# EAGLE board Simple_BRD (EAGLE 9.6.2)
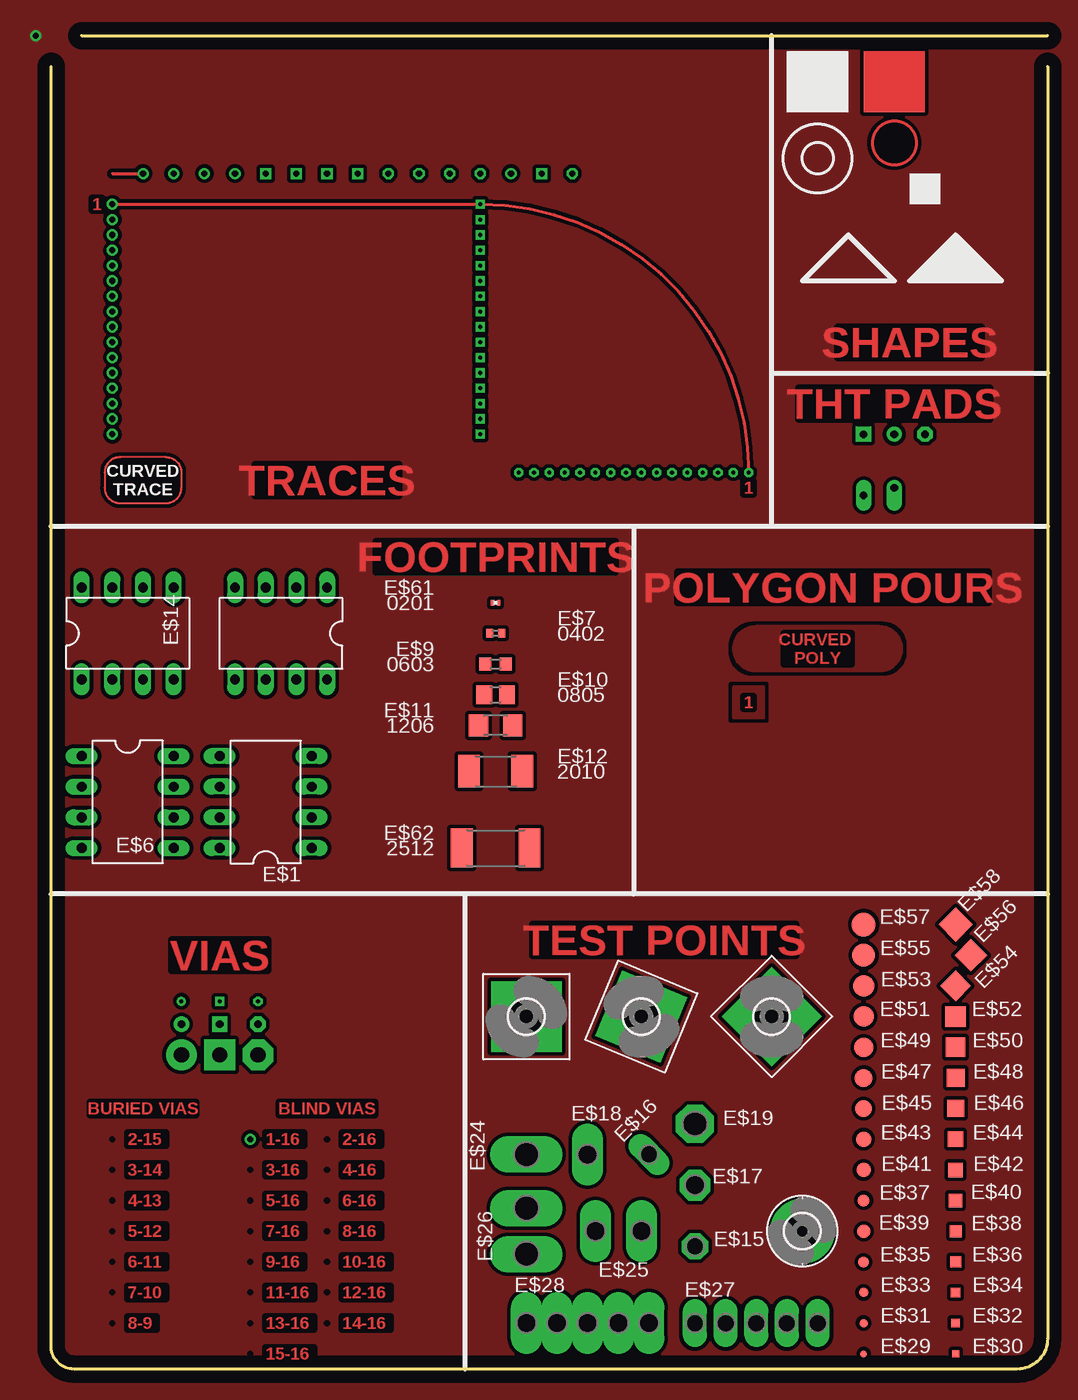
[diagram p0: board, top side]
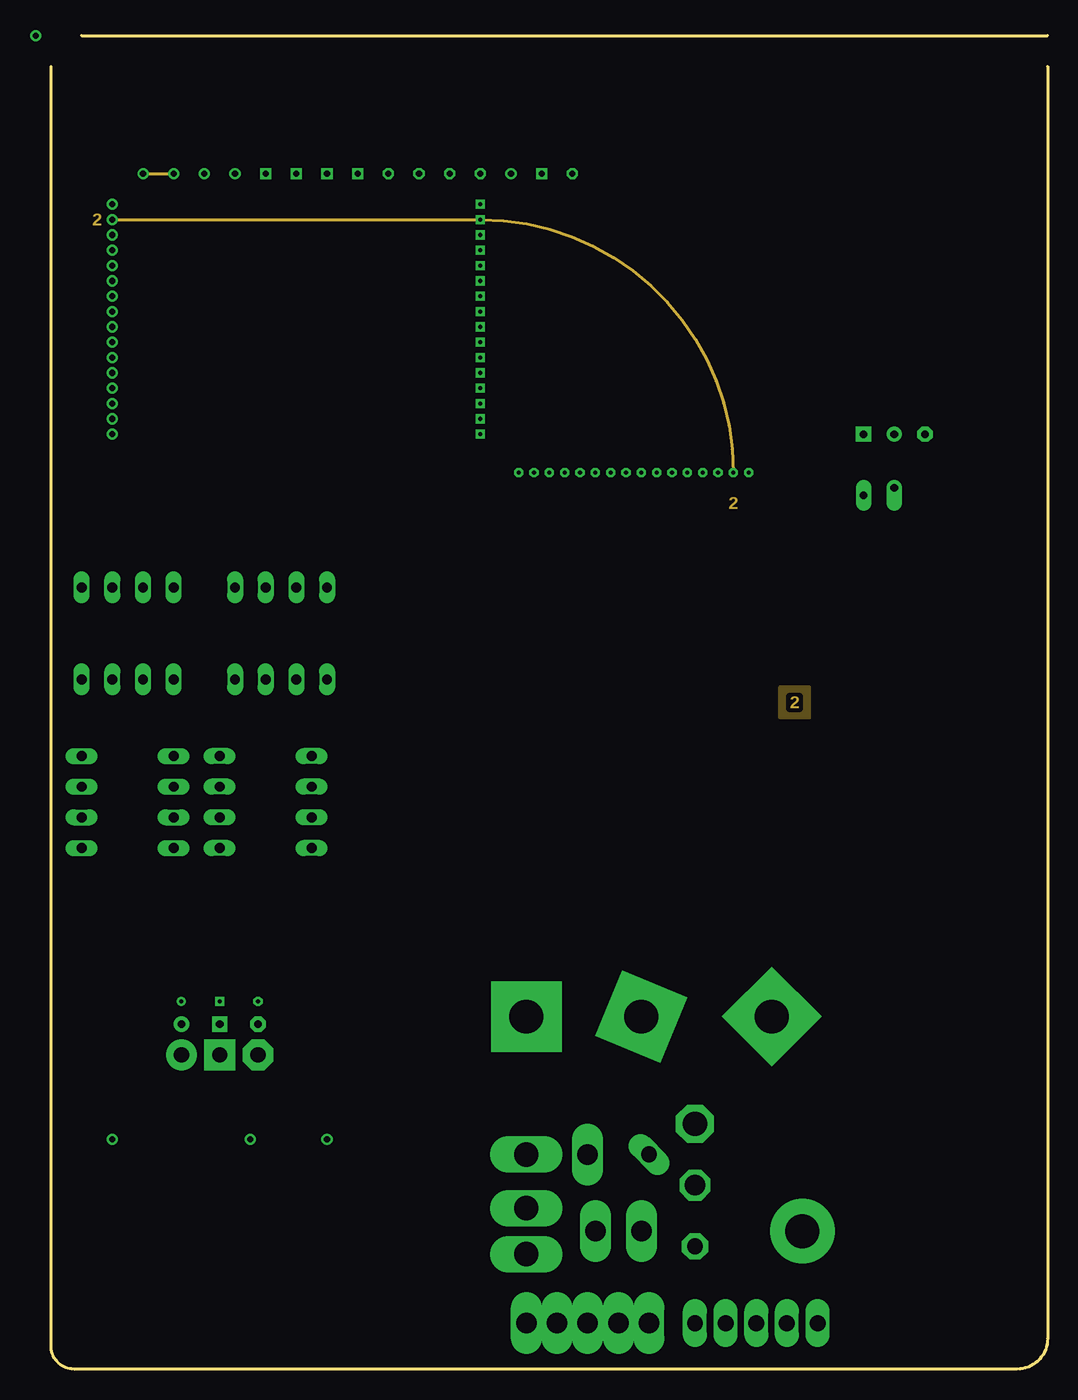
[diagram p1: board, inner layer Route2]
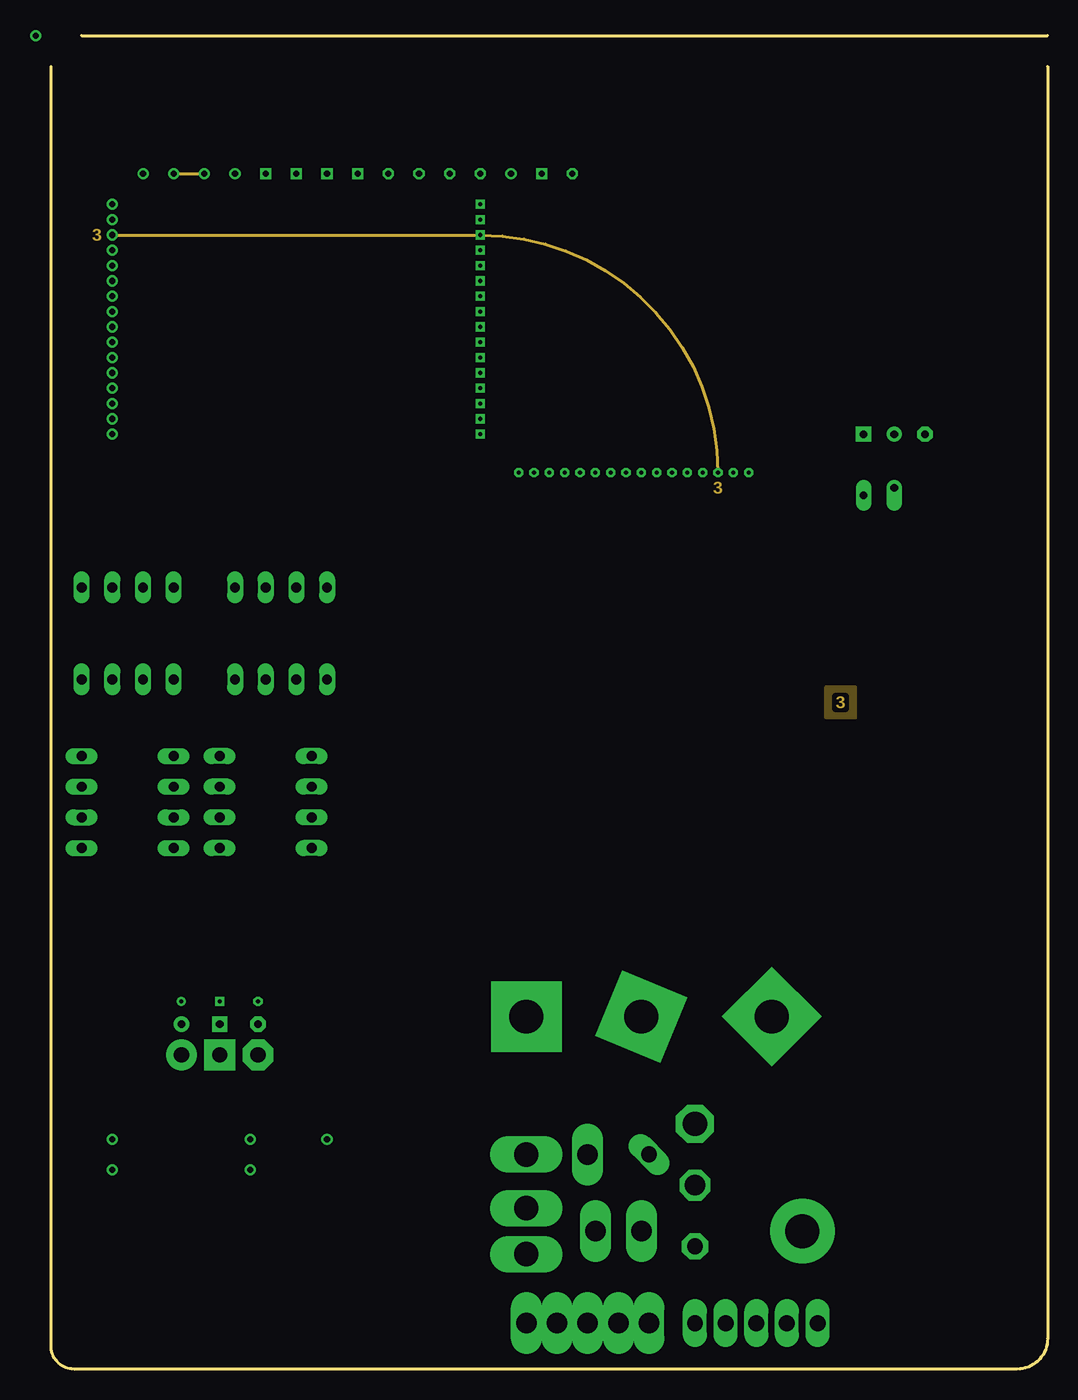
[diagram p2: board, inner layer Route3]
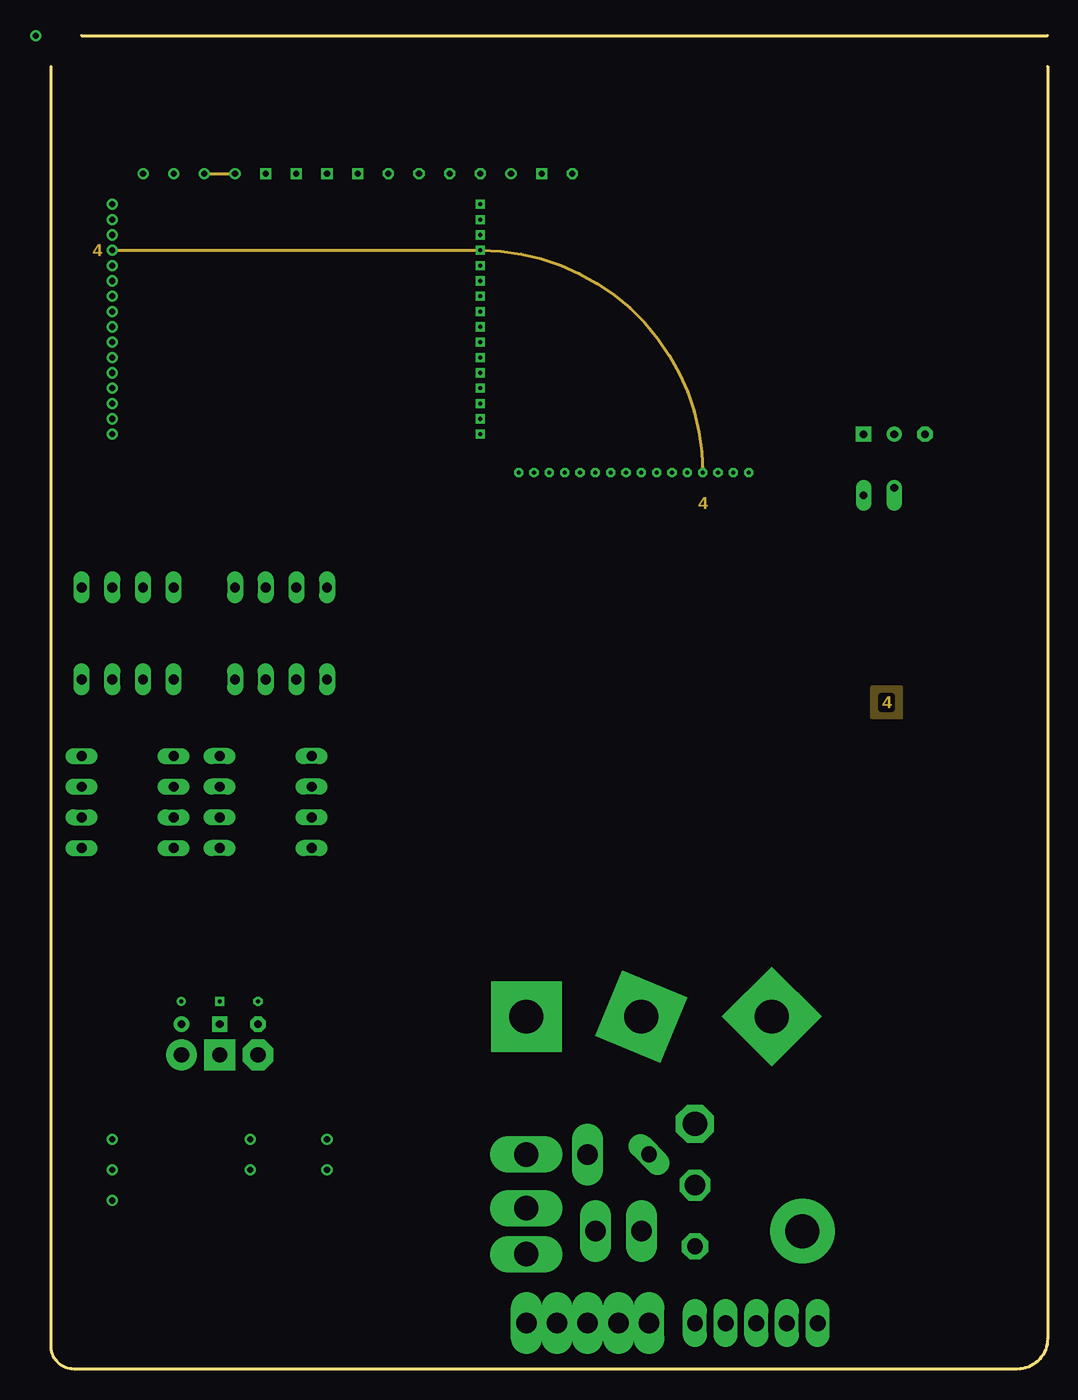
[diagram p3: board, inner layer Route4]
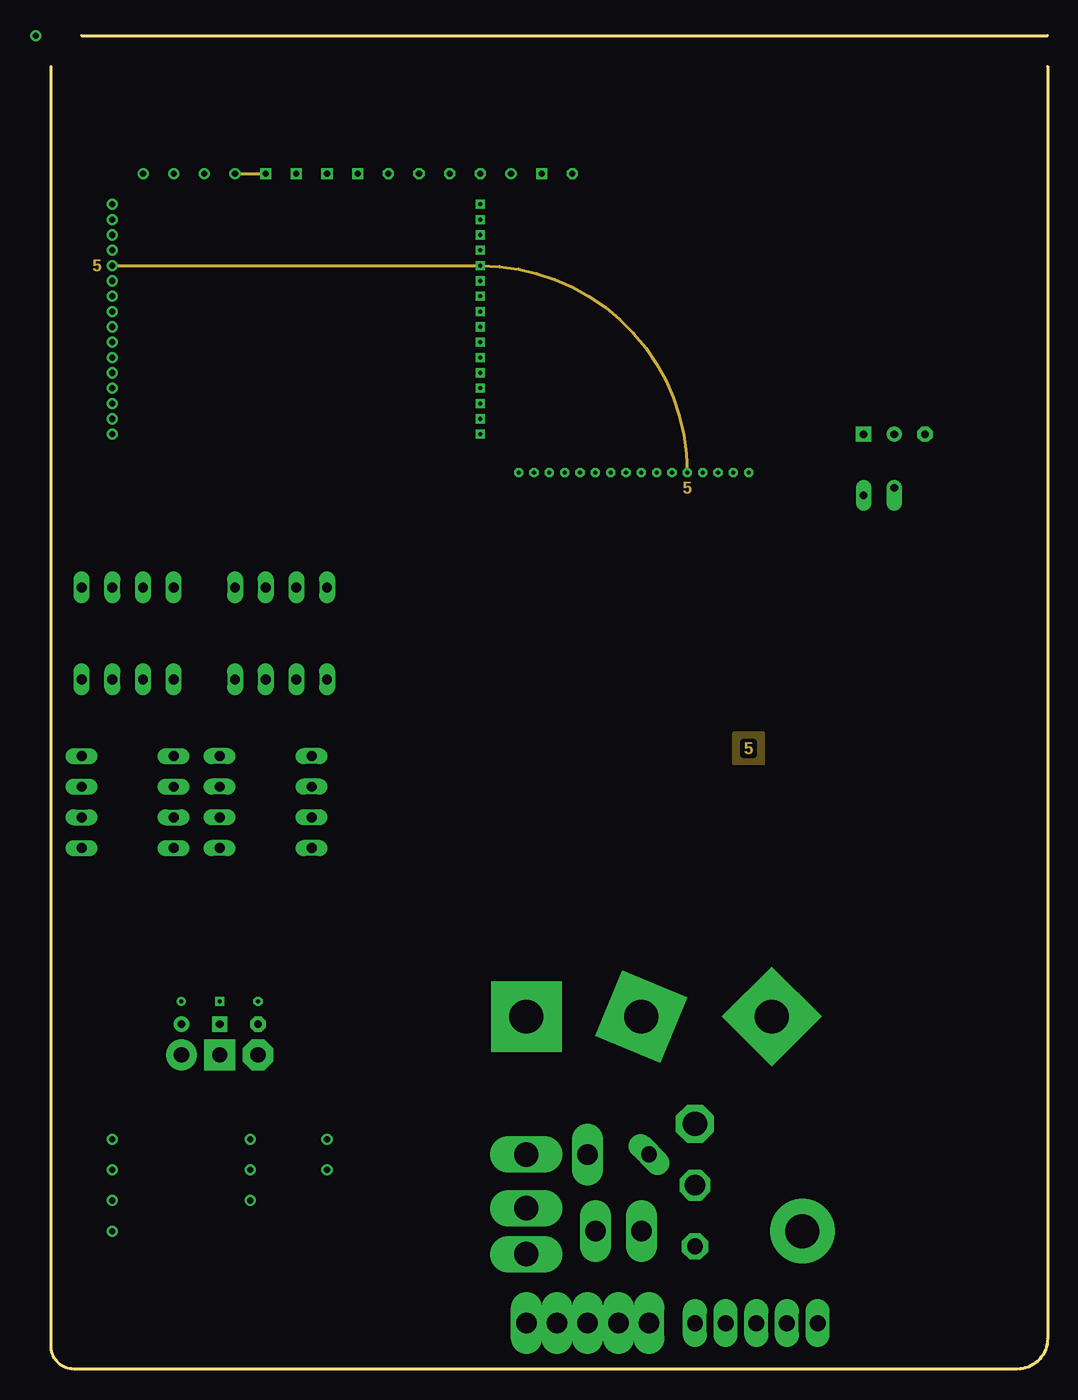
[diagram p4: board, inner layer Route5]
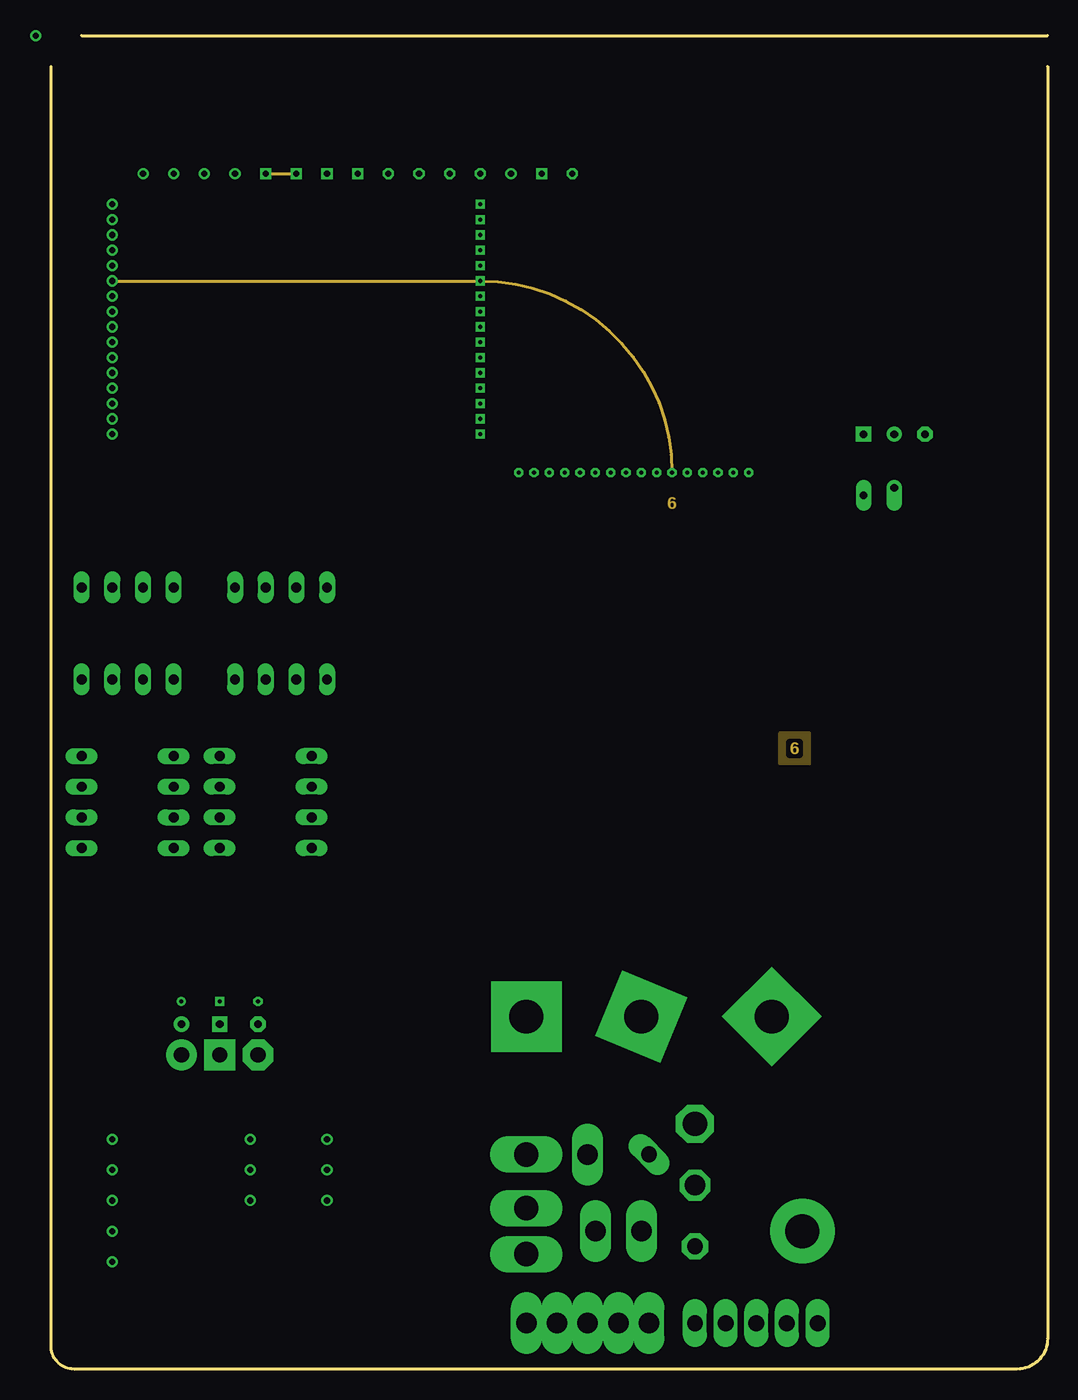
[diagram p5: board, inner layer Route6]
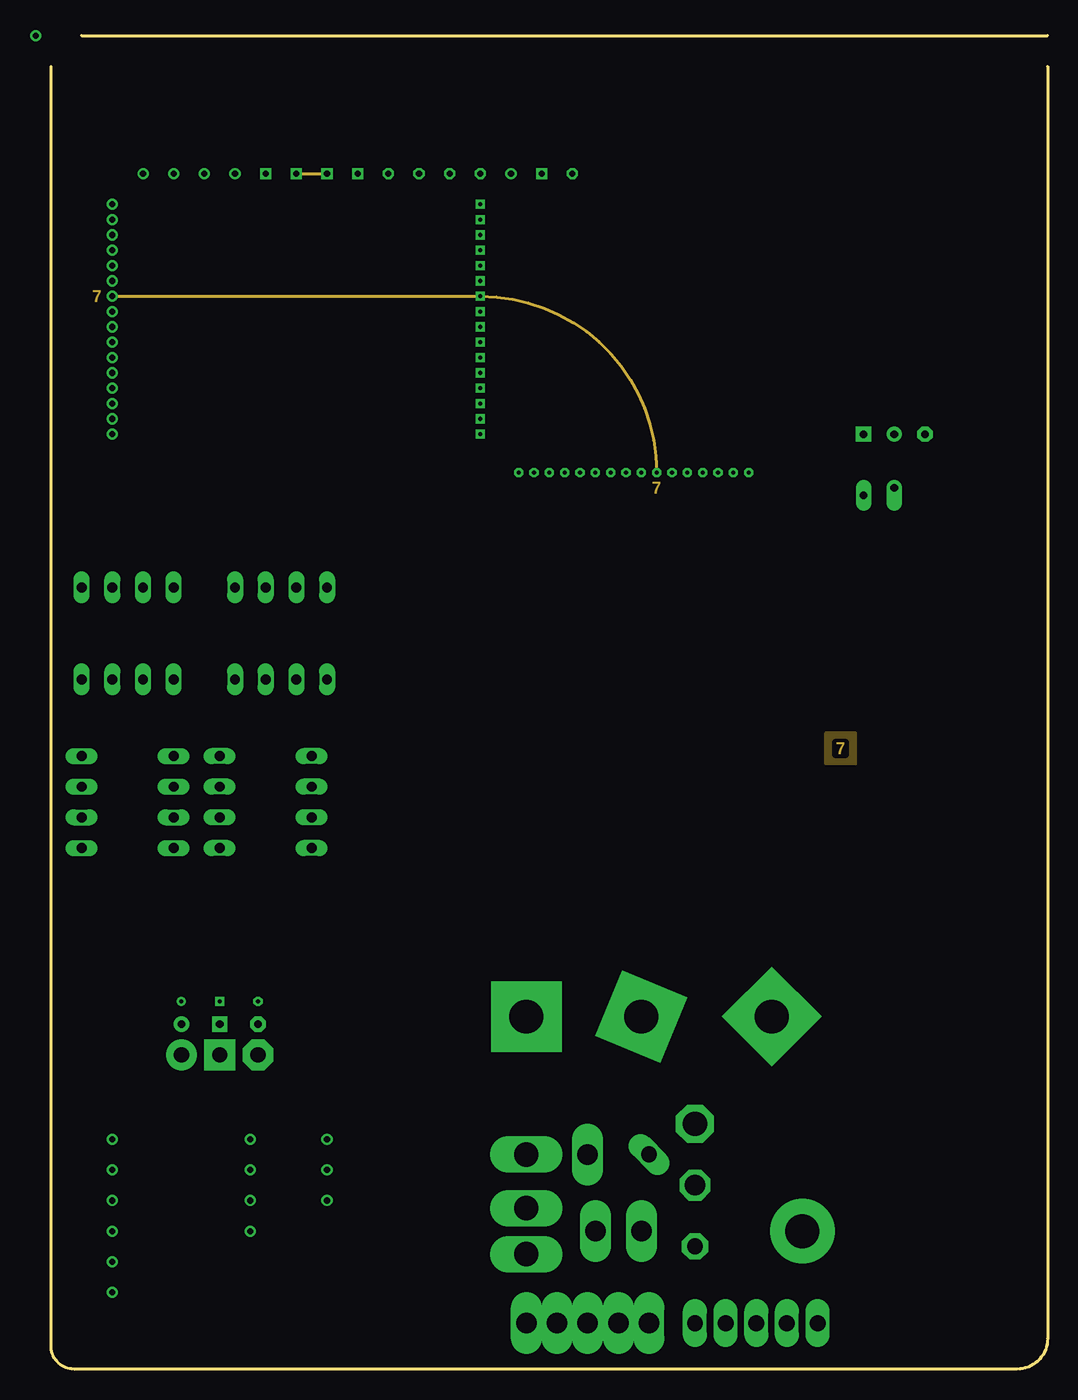
[diagram p6: board, inner layer Route7]
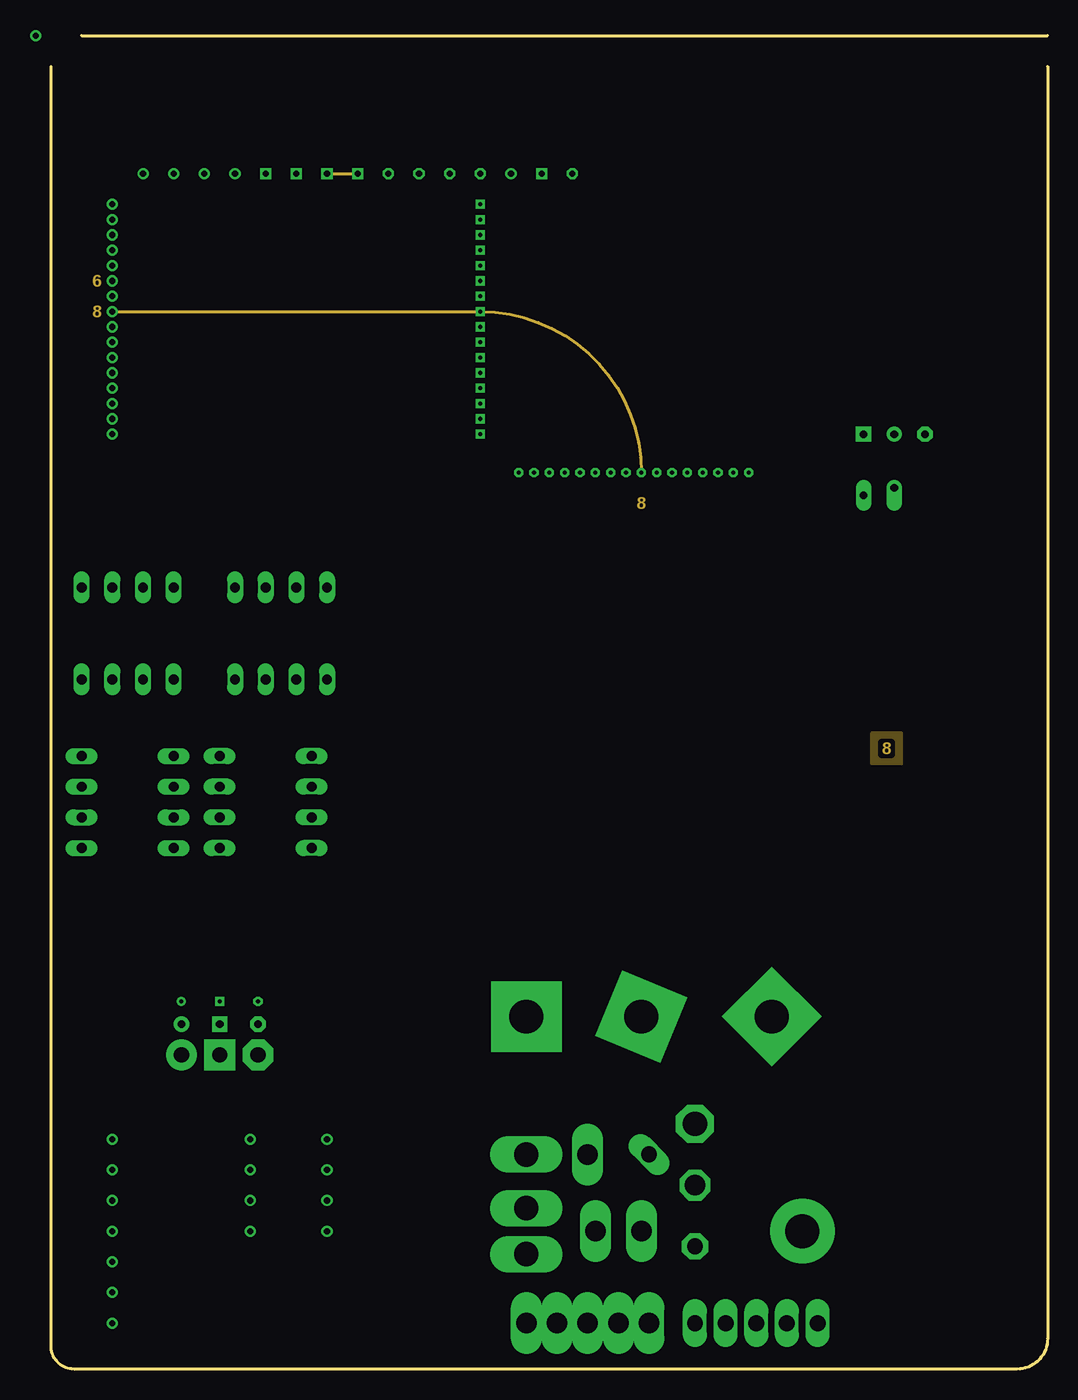
[diagram p7: board, inner layer Route8]
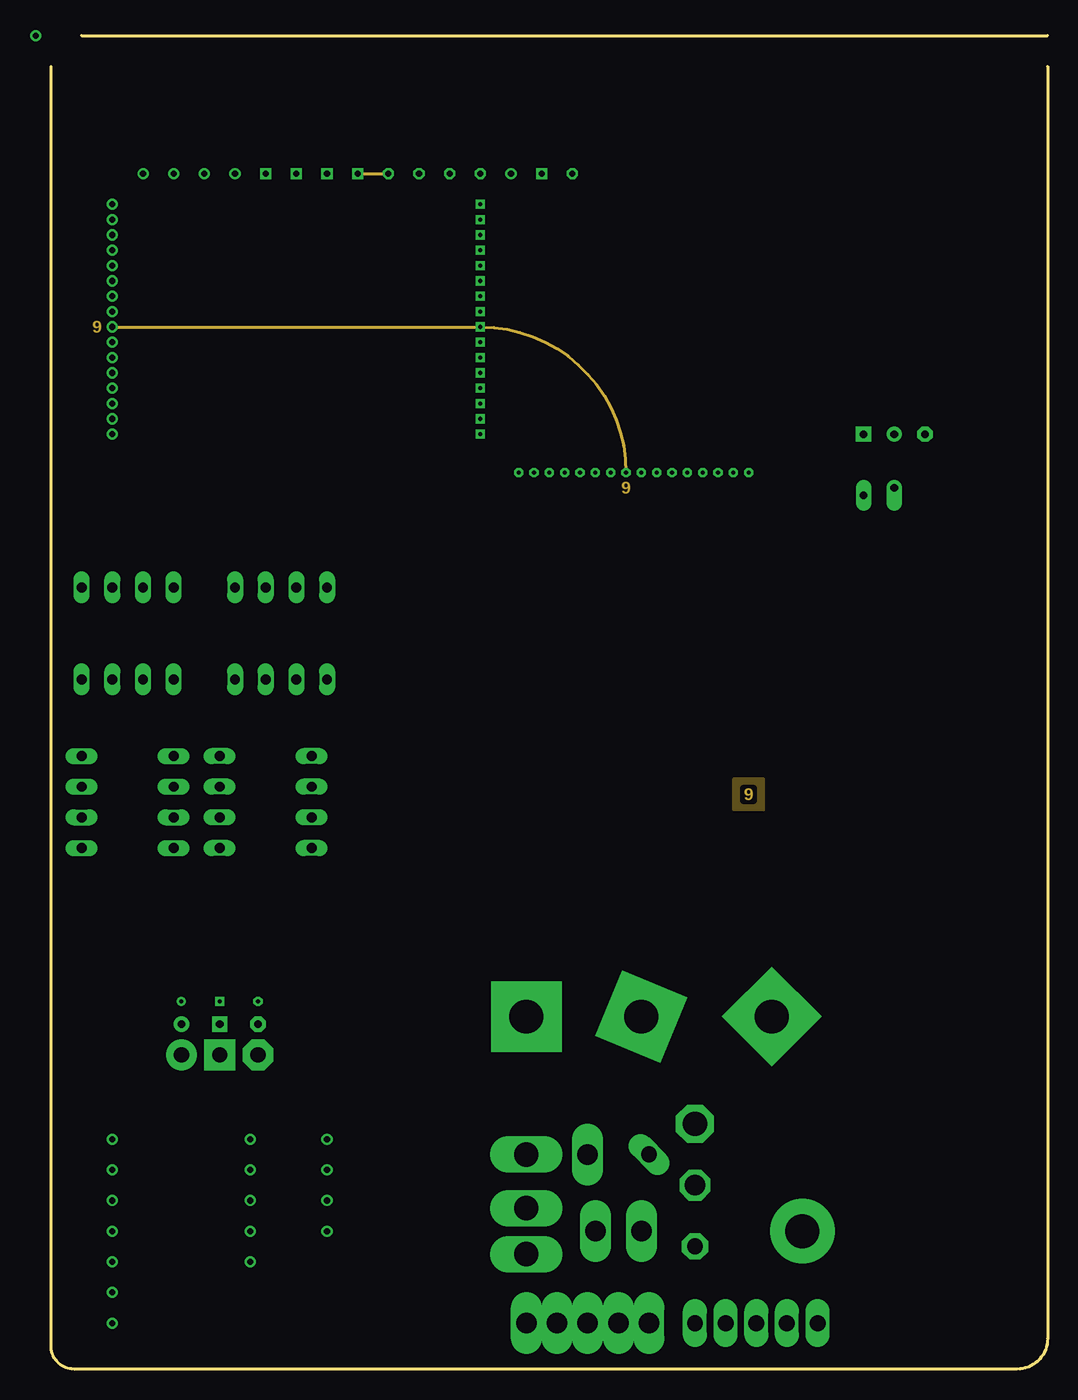
[diagram p8: board, inner layer Route9]
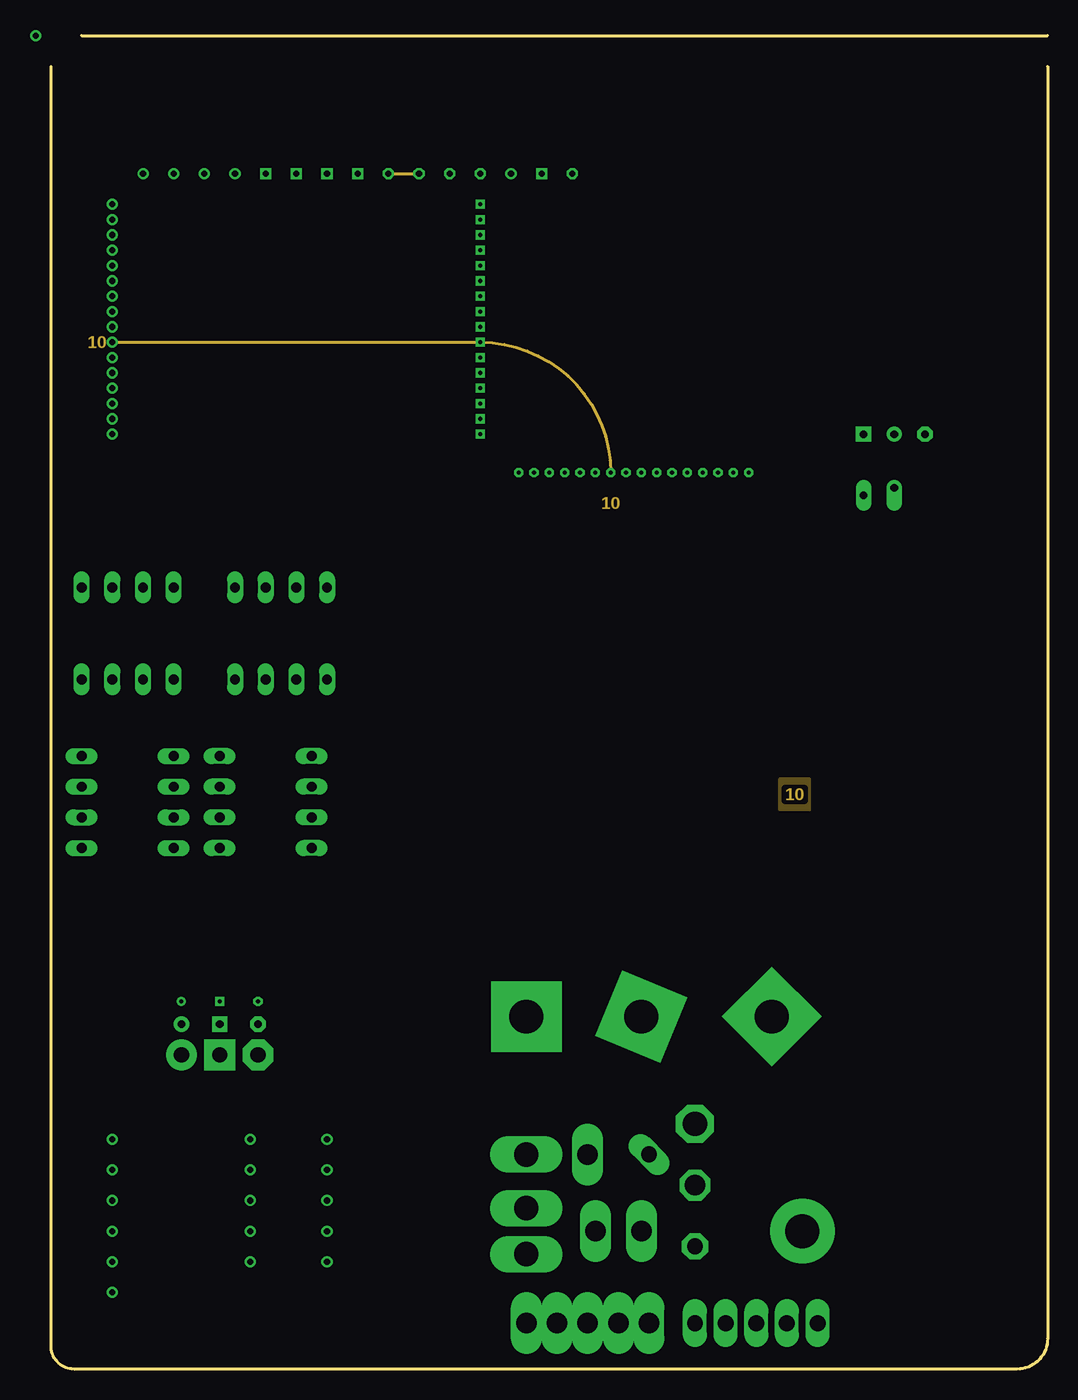
[diagram p9: board, inner layer Route10]
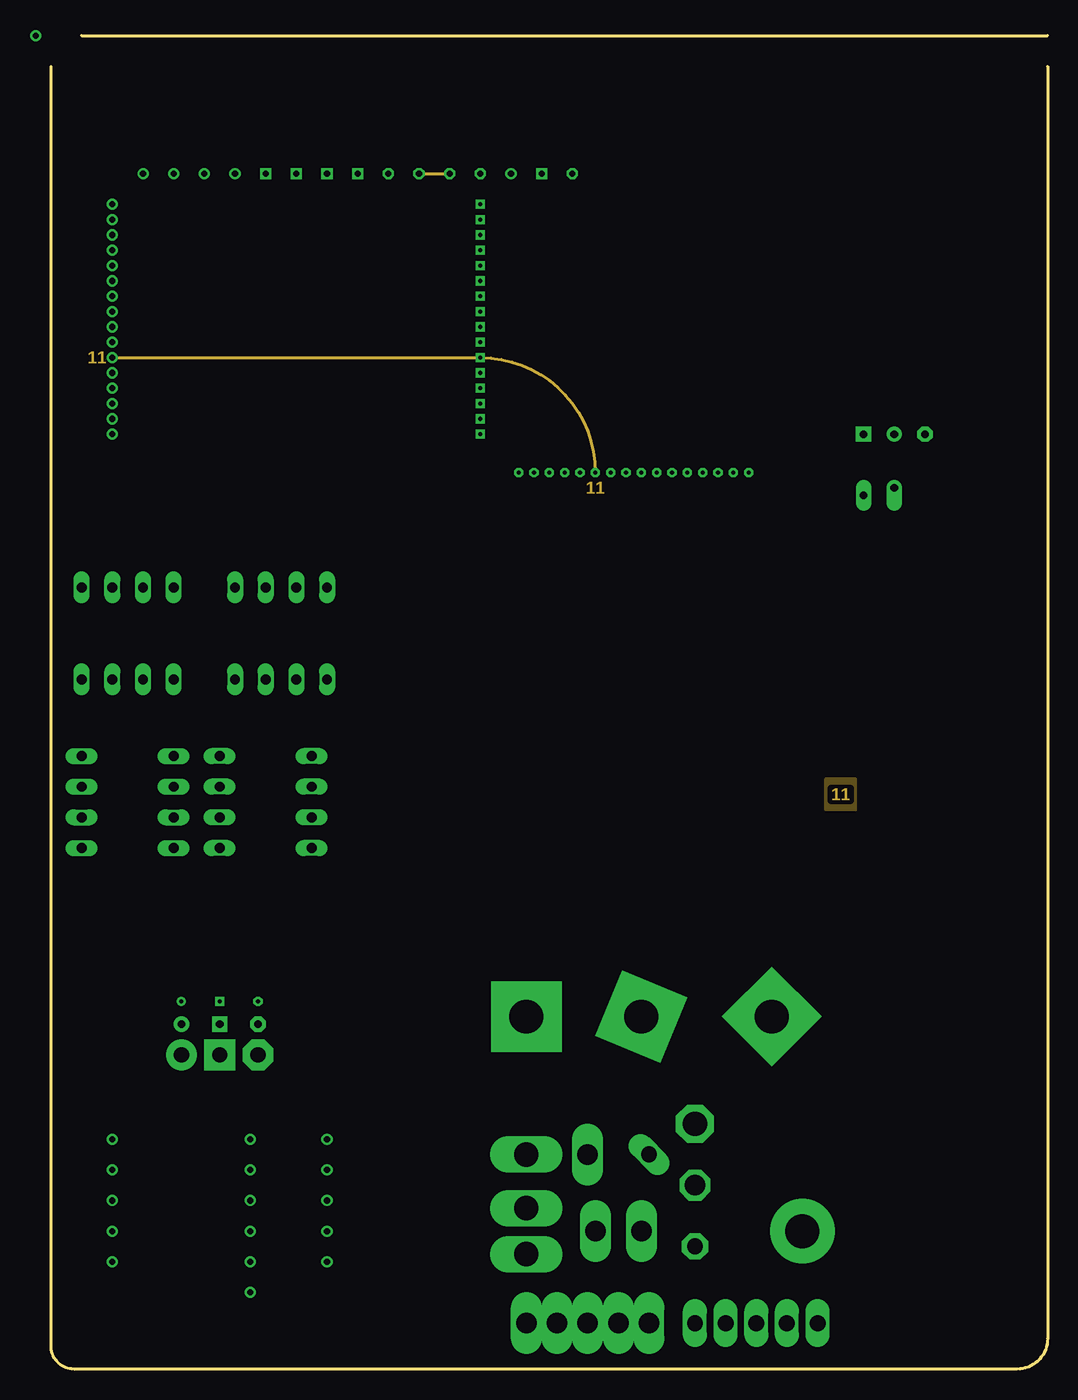
[diagram p10: board, inner layer Route11]
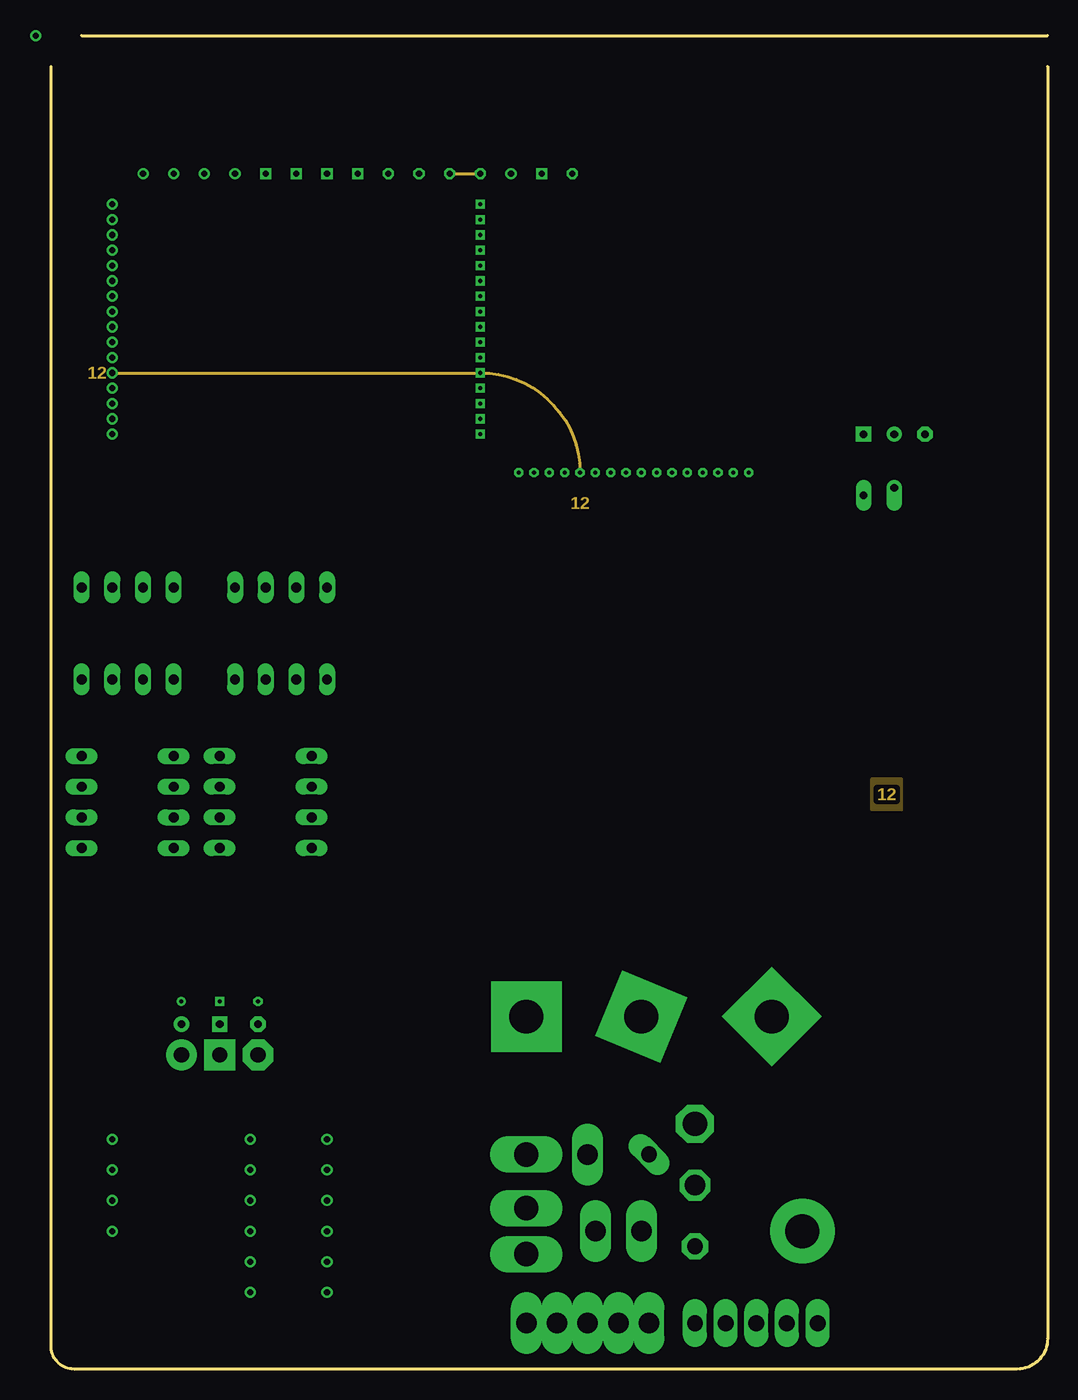
[diagram p11: board, inner layer Route12]
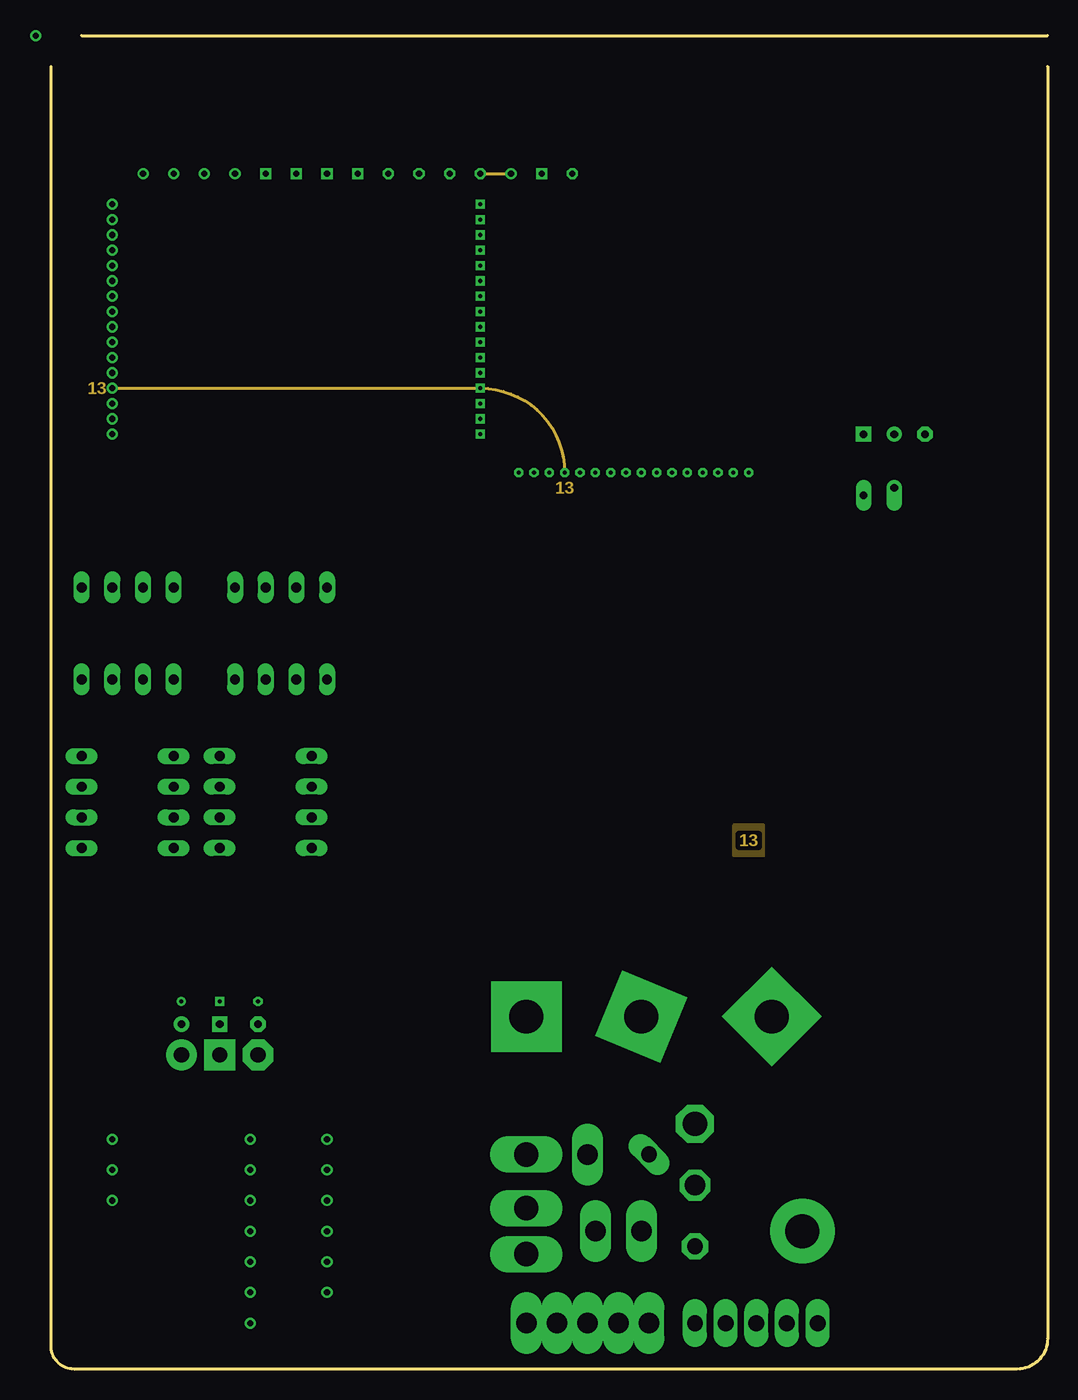
[diagram p12: board, inner layer Route13]
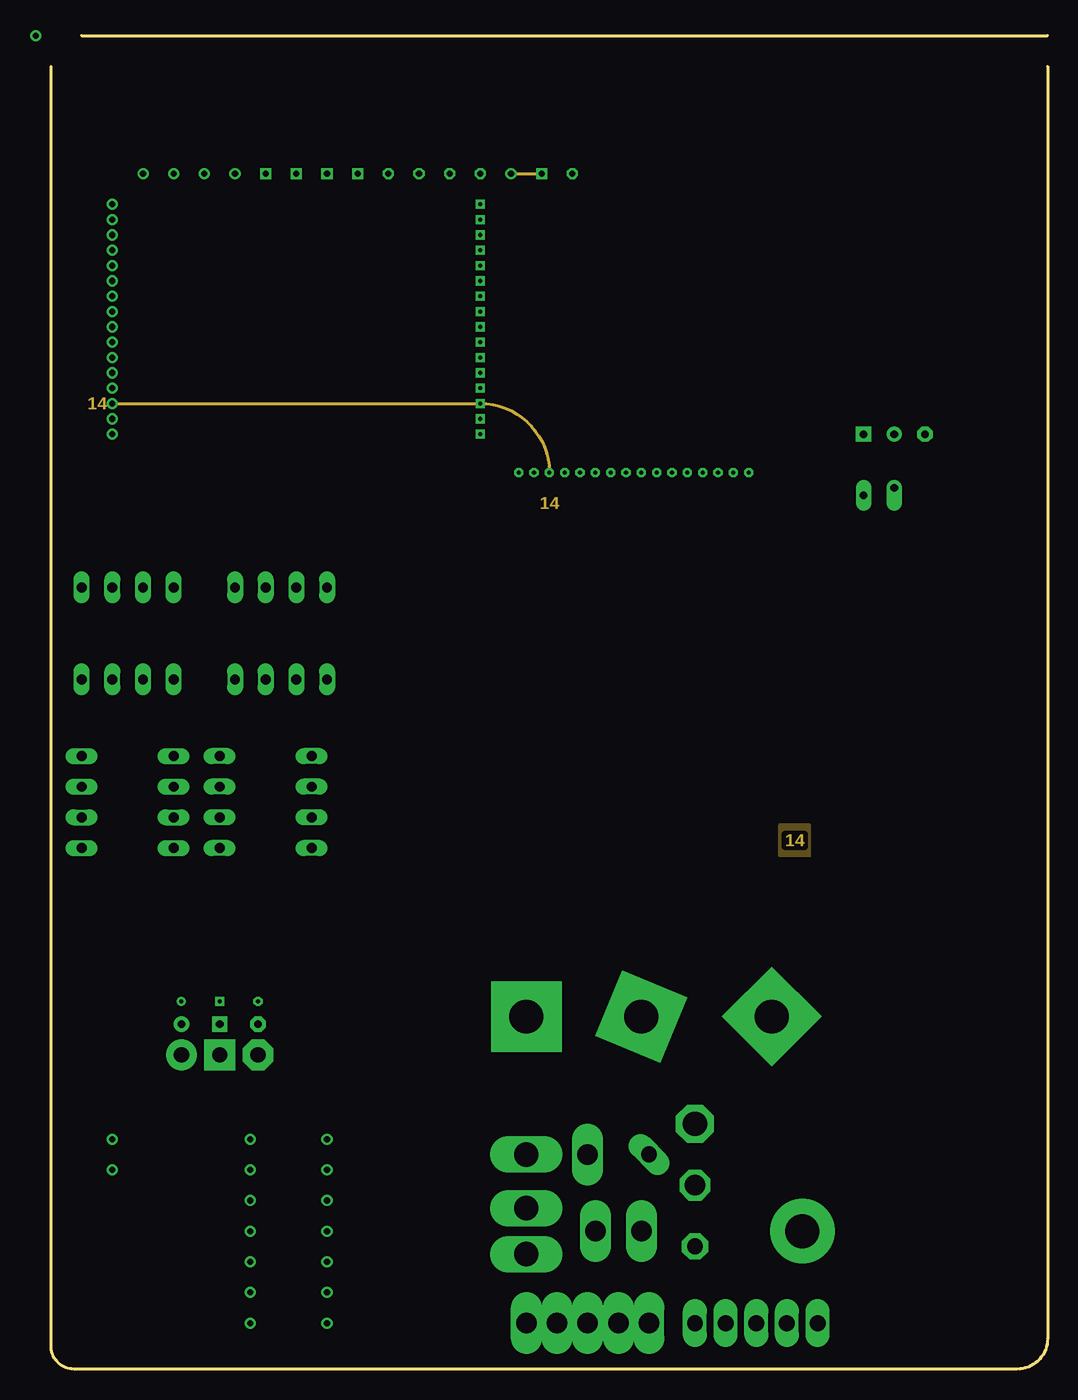
[diagram p13: board, inner layer Route14]
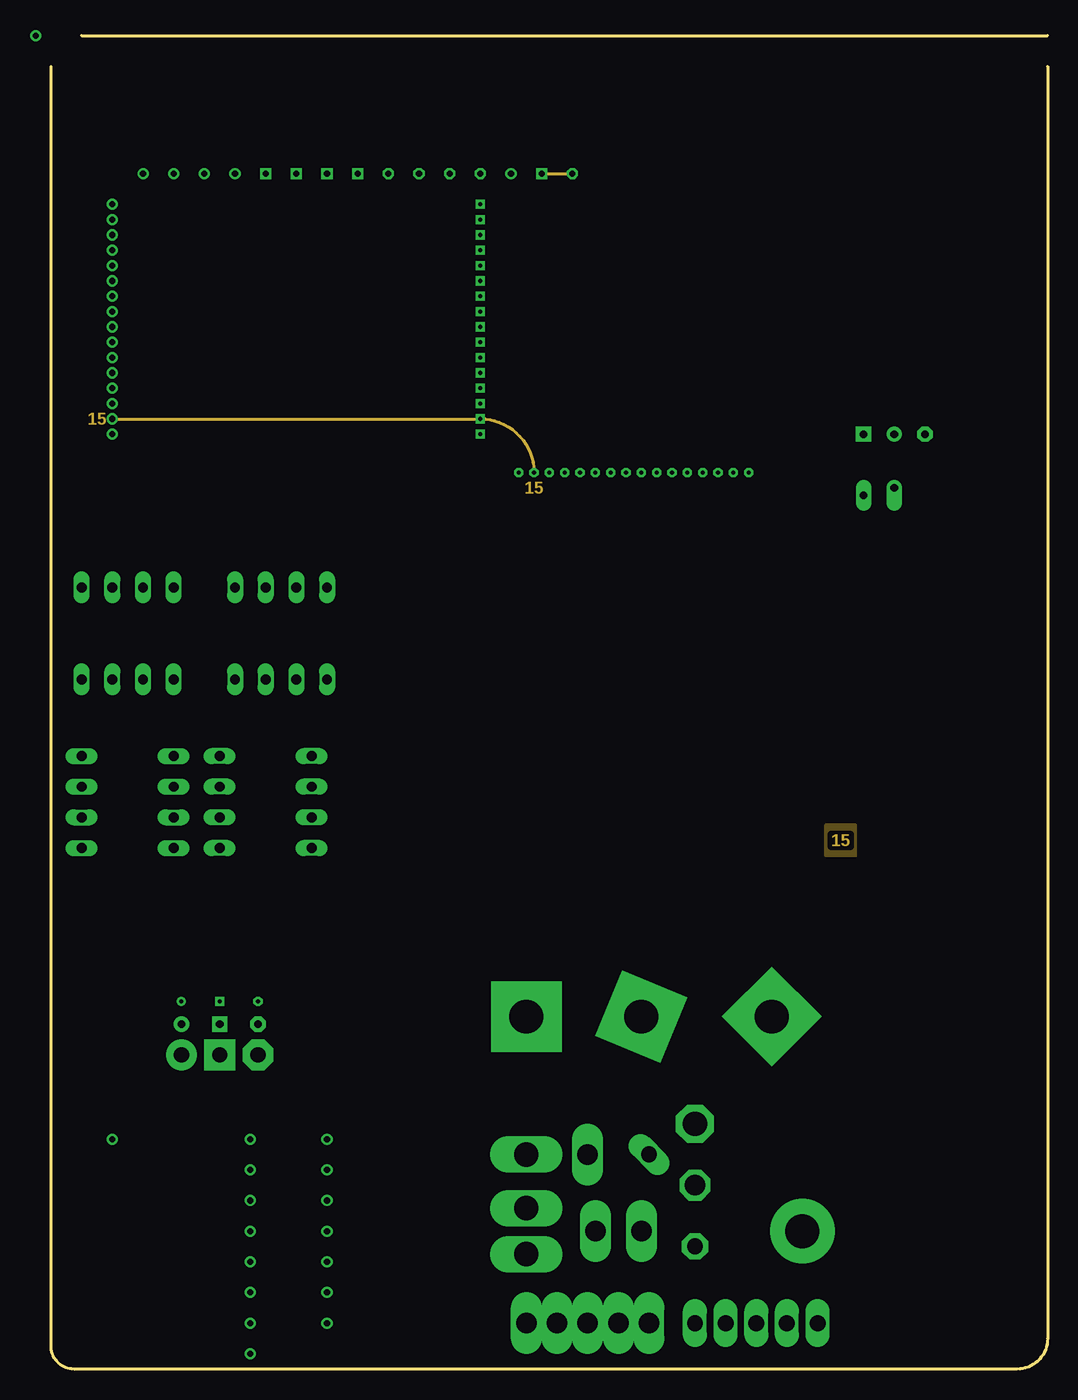
[diagram p14: board, inner layer Route15]
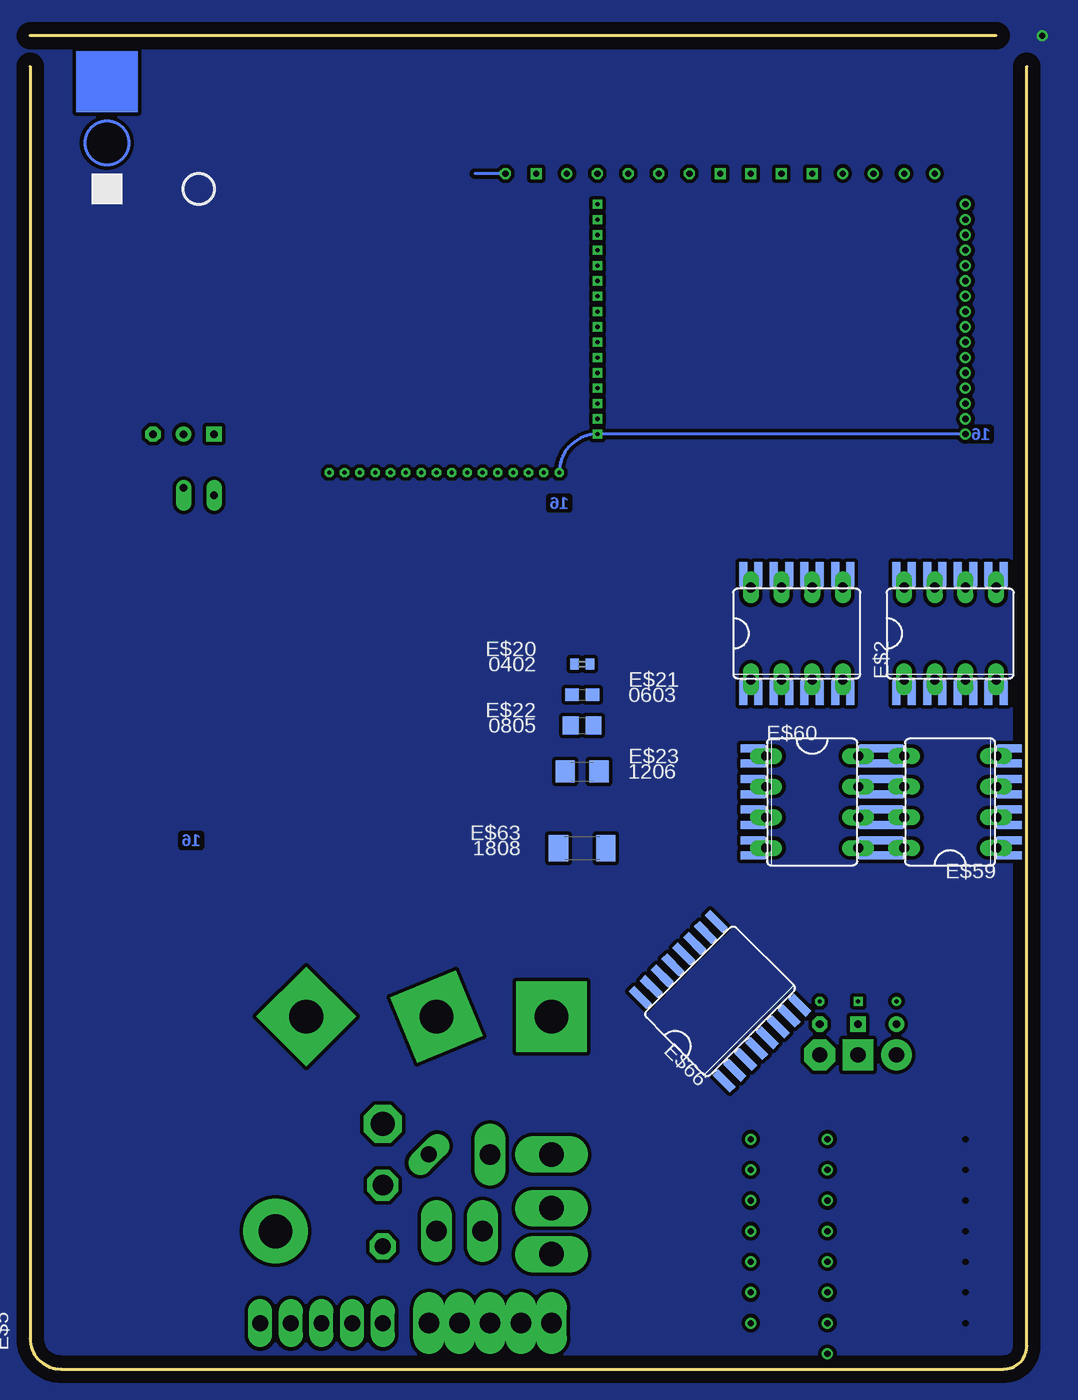
[diagram p15: board, bottom side, seen from below]

Size 82.55 x 110.49 mm. Coordinates in mm from the lower left corner, seen from the top.
Outline: 0,107.95 0,1.91 arc90 1.91,0 80.01,0 arc90 82.55,2.54 82.55,107.95
Outline: 2.54,110.49 82.55,110.49
Copper layers ([[[[[[[[[[[[[[1+(2*(3+(4*(5+(6*(7+(8*9)+10)*11)+12)*13)+14)*15)+16:15]:13]:11]:9]:7]:5]:3]:2]:4]:6]:8]:10]:12]:14]): Top 0.035mm / dielectric 1.5mm / Route2 0.035mm / dielectric 0.15mm / Route3 0.035mm / dielectric 0.2mm / Route4 0.035mm / dielectric 0.15mm / Route5 0.035mm / dielectric 0.2mm / Route6 0.035mm / dielectric 0.15mm / Route7 0.035mm / dielectric 0.2mm / Route8 0.035mm / dielectric 0.15mm / Route9 0.035mm / dielectric 0.2mm / Route10 0.035mm / dielectric 0.15mm / Route11 0.035mm / dielectric 0.2mm / Route12 0.035mm / dielectric 0.15mm / Route13 0.035mm / dielectric 0.2mm / Route14 0.035mm / dielectric 0.15mm / Route15 0.035mm / dielectric 0.2mm / Bottom 0.035mm
Design rules "default *": minimum track width 6mil, minimum drill 0.35mm, track to track 6mil, track to pad 6mil, pad to pad 6mil, via to via 6mil, smd to smd 6mil, copper to edge 40mil, drill to drill 6mil, minimum pad ring 10mil, minimum via ring 8mil, stop-mask expansion 4mil, vias tented up to drill 0mil, thermal gap 10mil

## Footprints (pad centres in the part's own frame; a part is rotated, then mirrored left to right if it is on the bottom)
DIL08 = drill 0.813 long: 1 -3.81,-3.81; 2 -1.27,-3.81; 3 1.27,-3.81; 4 3.81,-3.81; 5 3.81,3.81; 6 1.27,3.81; 7 -1.27,3.81; 8 -3.81,3.81
SO16L = smd 0.66 x 2.032: 1 -4.445,-4.902; 2 -3.175,-4.902; 3 -1.905,-4.902; 4 -0.635,-4.902; 5 0.635,-4.902; 6 1.905,-4.902; 7 3.175,-4.902; 8 4.445,-4.902; 9 4.445,4.902; 10 3.175,4.902; 11 1.905,4.902; 12 0.635,4.902; 13 -0.635,4.902; 14 -1.905,4.902; 15 -3.175,4.902; 16 -4.445,4.902
TEST = drill 0.635 pad 1.27 square: P$1 0,0 | drill 0.635 pad 1.27: P$2 2.54,0 | drill 0.635 pad 1.27 octagon: P$3 5.08,0 | drill 0.635 pad 1.27 long: P$4 0,-5.08 | drill 0.635 pad 1.27 offset: P$5 2.54,-4.445
2,8-PAD-SQUARE = drill 2.8 pad 5.842 square: B2,8 0,0
R0402 = smd 0.6 x 0.7: 1 -0.5,0; 2 0.5,0
2,8-PAD = drill 2.8 pad 5.334: B2,8 0,0
R0603 = smd 1 x 1.1: 1 -0.85,0; 2 0.85,0
R0805 = smd 1.3 x 1.5: 1 -0.95,0; 2 0.95,0
R1206 = smd 1.6 x 1.803: 1 -1.422,0; 2 1.422,0
R2010 = smd 1.8 x 2.7: 1 -2.2,0; 2 2.2,0
P1-13 = drill 1.321 pad 2.159 octagon: TP 0,0
P1-13Y = drill 1.321 pad 1.905 long: TP 0,0
P1-17 = drill 1.702 pad 2.54 octagon: TP 0,0
P1-17Y = drill 1.702 pad 2.121 long: TP 0,0
P1-20 = drill 2.007 pad 3.15 octagon: TP 0,0
C0402 = smd 0.7 x 0.9: 1 -0.65,0; 2 0.65,0
C0603 = smd 1.1 x 1: 1 -0.85,0; 2 0.85,0
C0805 = smd 1.3 x 1.5: 1 -0.95,0; 2 0.95,0
C1206 = smd 1.6 x 1.8: 1 -1.4,0; 2 1.4,0
P1-20Y = drill 2.007 pad 2.54 long: TP 0,0
P2-38-17 = drill 1.702 pad 2.121 long: TP-1 -1.905,0; TP-2 1.905,0
P2-38-20 = drill 2.007 pad 2.54 long: TP-1 -1.905,0; TP-2 1.905,0
P5-25-13 = drill 1.321 pad 1.905 long: TP-1 -5.08,0; TP-2 -2.54,0; TP-3 0,0; TP-4 2.54,0; TP-5 5.08,0
P5-25-17 = drill 1.702 pad 1.93 long: TP-1 -5.08,0; TP-2 -2.54,0; TP-3 0,0; TP-4 2.54,0; TP-5 5.08,0
TP06R = smd 0.6 x 0.6: TP 0,0
TP06SQ = smd 0.6 x 0.6: TP 0,0
TP07R = smd 0.7 x 0.7: TP 0,0
TP07SQ = smd 0.7 x 0.7: TP 0,0
TP08R = smd 0.8 x 0.8: TP 0,0
TP08SQ = smd 0.8 x 0.8: TP 0,0
TP09R = smd 0.9 x 0.9: TP 0,0
TP09SQ = smd 0.9 x 0.9: TP 0,0
TP10R = smd 1 x 1: TP 0,0
TP10SQ = smd 1 x 1: TP 0,0
TP11R = smd 1.1 x 1.1: TP 0,0
TP11SQ = smd 1.1 x 1.1: TP 0,0
TP12R = smd 1.2 x 1.2: TP 0,0
TP12SQ = smd 1.2 x 1.2: TP 0,0
TP13R = smd 1.3 x 1.3: TP 0,0
TP13SQ = smd 1.3 x 1.3: TP 0,0
TP14R = smd 1.4 x 1.4: TP 0,0
TP14SQ = smd 1.4 x 1.4: TP 0,0
TP15R = smd 1.5 x 1.5: TP 0,0
TP15SQ = smd 1.5 x 1.5: TP 0,0
TP16R = smd 1.6 x 1.6: TP 0,0
TP16SQ = smd 1.6 x 1.6: TP 0,0
TP17R = smd 1.7 x 1.7: TP 0,0
TP17SQ = smd 1.7 x 1.7: TP 0,0
TP18R = smd 1.8 x 1.8: TP 0,0
TP18SQ = smd 1.8 x 1.8: TP 0,0
TP19R = smd 1.9 x 1.9: TP 0,0
TP19SQ = smd 1.9 x 1.9: TP 0,0
TP20R = smd 2 x 2: TP 0,0
TP20SQ = smd 2 x 2: TP 0,0
R0201 = smd 0.28 x 0.43: 1 -0.255,0; 2 0.255,0
R2512 = smd 1.8 x 3.2: 1 -2.8,0; 2 2.8,0
C1808 = smd 1.6 x 2.2: 1 -1.95,0; 2 1.95,0

## Placement (x,y rotation side)
E$1  [DIL08]  17.78,46.99 90 top
E$2  [SO16L]  6.35,60.96 0 bottom
E$3  [TEST]  67.31,77.47 0 top
E$4  [2,8-PAD-SQUARE]  39.37,29.21 0 top
E$5  [SO16L]  19.05,60.96 0 bottom
E$6  [DIL08]  6.35,46.99 270 top
E$7  1R  [R0402]  36.83,60.96 0 top
E$8  [2,8-PAD]  62.23,11.43 0 top
E$9  2R  [R0603]  36.83,58.42 0 top
E$10  3R  [R0805]  36.83,55.88 0 top
E$11  4R  [R1206]  36.83,53.34 0 top
E$12  5R  [R2010]  36.83,49.53 0 top
E$13  [DIL08]  19.05,60.96 180 top
E$14  [DIL08]  6.35,60.96 0 top
E$15  [P1-13]  53.34,10.16 270 top
E$16  [P1-13Y]  49.53,17.78 45 top
E$17  [P1-17]  53.34,15.24 270 top
E$18  [P1-17Y]  44.45,17.78 0 top
E$19  [P1-20]  53.34,20.32 270 top
E$20  0C  [C0402]  36.83,58.42 0 bottom
E$21  2C  [C0603]  36.83,55.88 0 bottom
E$22  3C  [C0805]  36.83,53.34 0 bottom
E$23  4C  [C1206]  36.83,49.53 0 bottom
E$24  [P1-20Y]  39.37,17.78 90 top
E$25  [P2-38-17]  46.99,11.43 180 top
E$26  [P2-38-20]  39.37,11.43 90 top
E$27  [P5-25-13]  58.42,3.81 0 top
E$28  [P5-25-17]  44.45,3.81 0 top
E$29  [TP06R]  67.31,1.27 0 top
E$30  [TP06SQ]  74.93,1.27 0 top
E$31  [TP07R]  67.31,3.81 0 top
E$32  [TP07SQ]  74.93,3.81 0 top
E$33  [TP08R]  67.31,6.35 0 top
E$34  [TP08SQ]  74.93,6.35 0 top
E$35  [TP09R]  67.31,8.89 0 top
E$36  [TP09SQ]  74.93,8.89 0 top
E$37  [TP10R]  67.31,13.97 0 top
E$38  [TP10SQ]  74.93,11.43 0 top
E$39  [TP11R]  67.31,11.43 0 top
E$40  [TP11SQ]  74.93,13.97 0 top
E$41  [TP12R]  67.31,16.51 0 top
E$42  [TP12SQ]  74.93,16.51 0 top
E$43  [TP13R]  67.31,19.05 0 top
E$44  [TP13SQ]  74.93,19.05 0 top
E$45  [TP14R]  67.31,21.59 0 top
E$46  [TP14SQ]  74.93,21.59 0 top
E$47  [TP15R]  67.31,24.13 0 top
E$48  [TP15SQ]  74.93,24.13 0 top
E$49  [TP16R]  67.31,26.67 0 top
E$50  [TP16SQ]  74.93,26.67 0 top
E$51  [TP17R]  67.31,29.21 0 top
E$52  [TP17SQ]  74.93,29.21 0 top
E$53  [TP18R]  67.31,31.75 0 top
E$54  [TP18SQ]  74.93,31.75 45 top
E$55  [TP19R]  67.31,34.29 0 top
E$56  [TP19SQ]  76.2,34.29 45 top
E$57  [TP20R]  67.31,36.83 0 top
E$58  [TP20SQ]  74.93,36.83 45 top
E$59  [SO16L]  6.35,46.99 90 bottom
E$60  [SO16L]  17.78,46.99 270 bottom
E$61  0R  [R0201]  36.83,63.5 0 top
E$62  6R  [R2512]  36.83,43.18 0 top
E$63  5C  [C1808]  36.83,43.18 0 bottom
E$64  [2,8-PAD-SQUARE]  48.9,29.21 67.5 top
E$65  [2,8-PAD-SQUARE]  59.69,29.21 45 top
E$66  [SO16L]  25.4,30.48 45 bottom

## Library data of the parts
E$1 E$2 E$5 E$6 E$13 E$14 E$59 E$60 E$66 = 74xx-us
E$3 = untitled
E$4 E$8 E$64 E$65 = holes
E$7 E$9-E$12 E$20-E$23 E$61-E$63 = rcl
E$15-E$19 E$24-E$58 = testpad

## Tracks (layer width: path | path; a pad name or v marks a point on that pad's centre or on a via)
GND1  (via drill 0.51)
  other vias: -1.27,110.49
  pour Bottom (isolate 0.305): -13.97,129.54 -13.97,-2.54 114.3,-2.54 114.3,129.54
  pour Top (isolate 0.305, rank 2): -27.94,114.3 -27.94,-2.54 88.9,-2.54 88.9,114.3
S$1  (via drill 0.35, 0.51)
  Top 0.254: v5.08,96.52 v35.56,96.52 arc-90 v57.78,74.3
S$2  (via drill 0.35, 0.51)
  Route2 0.254: v5.08,95.25 v35.56,95.25 arc-90 v56.52,74.3
S$3  (via drill 0.35)
  other vias: 10.79,30.48
S$4  (via drill 0.35, 0.51)
  Route3 0.254: v5.08,93.98 v35.56,93.98 arc-90 v55.24,74.3
S$5  (via drill 0.35, 0.51)
  Route4 0.254: v5.08,92.71 v35.56,92.71 arc-90 v53.98,74.3
S$6  (via drill 0.35, 0.51)
  Route5 0.254: v5.08,91.44 v35.56,91.44 arc-90 v52.7,74.3
S$7  (via drill 0.35, 0.51)
  Route6 0.254: v5.08,90.17 v35.56,90.17 arc-90 v51.44,74.3
S$8  (via drill 0.35, 0.51)
  Route7 0.254: v5.08,88.9 v35.56,88.9 arc-90 v50.16,74.3
S$9  (via drill 0.35, 0.51)
  Route8 0.254: v5.08,87.63 v35.56,87.63 arc-90 v48.9,74.3
S$10  (via drill 0.35, 0.51)
  Route9 0.254: v5.08,86.36 v35.56,86.36 arc-90 v47.62,74.3
S$11  (via drill 0.35, 0.51)
  Route10 0.254: v5.08,85.09 v35.56,85.09 arc-90 v46.35,74.3
S$12  (via drill 0.35, 0.51)
  Route12 0.254: v5.08,82.55 v35.56,82.55 arc-90 v43.81,74.3
S$13  (via drill 0.35, 0.51)
  Route11 0.254: v5.08,83.82 v35.56,83.82 arc-90 v45.09,74.3
S$14  (via drill 0.35, 0.51)
  Route13 0.254: v5.08,81.28 v35.56,81.28 arc-90 v42.55,74.3
S$15  (via drill 0.35, 0.51)
  Route14 0.254: v5.08,80.01 v35.56,80.01 arc-90 v41.27,74.3
S$16  (via drill 0.35, 0.51)
  Route15 0.254: v5.08,78.74 v35.56,78.74 arc-90 v40.01,74.3
S$17  (via drill 0.35, 0.51)
  Bottom 0.254: v5.08,77.47 v35.56,77.47 arc-90 v38.73,74.3
S$18  (via drill 0.35)
  other vias: 13.97,30.48
S$19  (via drill 0.35)
  other vias: 17.14,30.48
S$20  (via drill 0.64 pad 1.27)
  other vias: 10.79,28.58
S$21
  Top 0.152: 9.53,75.56 5.71,75.56 arc90 4.45,74.3 4.45,73.03 arc90 5.71,71.75 9.53,71.75 arc90 10.79,73.03 10.79,74.3 arc90 9.53,75.56
S$22  (via drill 0.64 pad 1.27)
  other vias: 13.97,28.58
S$23  (via drill 0.64 pad 1.27)
  other vias: 17.14,28.58
S$24  (via drill 0.51)
  Top 0.254: 5.08,99.06 v7.62,99.06
  Route2 0.254: v7.62,99.06 v10.16,99.06
  Route3 0.254: v10.16,99.06 v12.7,99.06
  Route4 0.254: v12.7,99.06 v15.24,99.06
  Route5 0.254: v15.24,99.06 v17.78,99.06
  Route6 0.254: v17.78,99.06 v20.32,99.06
  Route7 0.254: v20.32,99.06 v22.86,99.06
  Route8 0.254: v22.86,99.06 v25.4,99.06
  Route9 0.254: v25.4,99.06 v27.94,99.06
  Route10 0.254: v27.94,99.06 v30.48,99.06
  Route11 0.254: v30.48,99.06 v33.02,99.06
  Route12 0.254: v33.02,99.06 v35.56,99.06
  Route13 0.254: v35.56,99.06 v38.1,99.06
  Route14 0.254: v38.1,99.06 v40.64,99.06
  Route15 0.254: v40.64,99.06 v43.18,99.06
  Bottom 0.254: v43.18,99.06 45.72,99.06
S$25  (via drill 1.27 pad 2.54)
  other vias: 10.79,26.04
S$26  (via drill 1.27 pad 2.54)
  other vias: 13.97,26.04
S$27  (via drill 1.27 pad 2.54)
  other vias: 17.14,26.04
S$29  (via drill 0.51 layers 2-16)
  other vias: 22.86,19.05
S$30  (via drill 0.51 layers 2-15)
  other vias: 5.08,19.05
S$31  (via drill 0.51 layers 3-14)
  other vias: 5.08,16.51
S$32  (via drill 0.51 layers 4-13)
  other vias: 5.08,13.97
S$33  (via drill 0.51 layers 5-12)
  other vias: 5.08,11.43
S$34  (via drill 0.51 layers 6-11)
  other vias: 5.08,8.89
S$35  (via drill 0.51 layers 7-10)
  other vias: 5.08,6.35
S$36  (via drill 0.51 layers 8-9)
  other vias: 5.08,3.81
S$37  (via drill 0.51 layers 15-16)
  other vias: 16.51,1.27
S$38  (via drill 0.51)
  other vias: 16.51,19.05
S$39  (via drill 0.51 layers 4-16)
  other vias: 22.86,16.51
S$40  (via drill 0.51 layers 3-16)
  other vias: 16.51,16.51
S$41  (via drill 0.51 layers 6-16)
  other vias: 22.86,13.97
S$42  (via drill 0.51 layers 5-16)
  other vias: 16.51,13.97
S$43  (via drill 0.51 layers 8-16)
  other vias: 22.86,11.43
S$44  (via drill 0.51 layers 7-16)
  other vias: 16.51,11.43
S$45  (via drill 0.51 layers 14-16)
  other vias: 22.86,3.81
S$46  (via drill 0.51 layers 9-16)
  other vias: 16.51,8.89
S$48  (via drill 0.51 layers 11-16)
  other vias: 16.51,6.35
S$49  (via drill 0.51 layers 10-16)
  other vias: 22.86,8.89
S$50  (via drill 0.51 layers 13-16)
  other vias: 16.51,3.81
S$51  (via drill 0.51 layers 12-16)
  other vias: 22.86,6.35
TEST
  pour Top (isolate 0.305): 56.52,56.52 56.52,53.98 59.05,53.98 59.05,56.52
TEST1
  pour Route2 (isolate 0.305): 60.33,56.52 60.33,53.98 62.87,53.98 62.87,56.52
TEST2
  pour Route3 (isolate 0.305): 64.14,56.52 64.14,53.98 66.67,53.98 66.67,56.52
TEST3
  pour Route4 (isolate 0.305): 67.94,56.52 67.94,53.98 70.48,53.98 70.48,56.52
TEST4
  pour Route5 (isolate 0.305): 56.52,52.7 56.52,50.16 59.05,50.16 59.05,52.7
TEST5
  pour Route6 (isolate 0.305): 60.33,52.7 60.33,50.16 62.87,50.16 62.87,52.7
TEST6
  pour Route7 (isolate 0.305): 64.14,52.7 64.14,50.16 66.67,50.16 66.67,52.7
TEST7
  pour Route8 (isolate 0.305): 67.94,52.7 67.94,50.16 70.48,50.16 70.48,52.7
TEST8
  pour Route9 (isolate 0.305): 56.52,48.9 56.52,46.36 59.05,46.36 59.05,48.9
TEST9
  pour Route10 (isolate 0.305): 60.33,48.9 60.33,46.36 62.87,46.36 62.87,48.9
TEST10
  pour Route11 (isolate 0.305): 64.14,48.9 64.14,46.36 66.67,46.36 66.67,48.9
TEST11
  pour Route12 (isolate 0.305): 67.94,48.9 67.94,46.36 70.48,46.36 70.48,48.9
TEST12
  pour Route13 (isolate 0.305): 56.52,45.09 56.52,42.55 59.05,42.55 59.05,45.09
TEST13
  pour Route14 (isolate 0.305): 60.33,45.09 60.33,42.55 62.87,42.55 62.87,45.09
TEST14
  pour Route15 (isolate 0.305): 64.14,45.09 64.14,42.55 66.67,42.55 66.67,45.09
TEST15
  pour Bottom (isolate 0.305): 67.94,45.09 67.94,42.55 70.48,42.55 70.48,45.09
TEST17
  pour Top (isolate 0.305): 56.52,59.69 arc-90 58.42,61.59 68.58,61.59 arc-90 70.48,59.69 arc-90 68.58,57.79 58.42,57.79 arc-90
(copper drawn outside any net)
  shapes: Bottom area x1, Bottom circle x1, Top area x1, Top circle x1

## Text on the board
Top: 1 | SHAPES | THT PADS | TRACES | 1 | FOOTPRINTS | POLYGON POURS | CURVED / POLY | 1 | TEST POINTS | VIAS | BURIED VIAS | BLIND VIAS | 2-15 | 1-16 | 2-16 | 3-14 | 3-16 | 4-16 | 4-13 | 5-16 | 6-16 | 5-12 | 7-16 | 8-16 | 6-11 | 9-16 | 10-16 | 7-10 | 11-16 | 12-16 | 8-9 | 13-16 | 14-16 | 15-16
Route2: 2 | 2 | 2
Route3: 3 | 3 | 3
Route4: 4 | 4 | 4
Route5: 5 | 5 | 5
Route6: 6 | 6
Route7: 7 | 7 | 7
Route8: 6 | 8 | 8 | 8
Route9: 9 | 9 | 9
Route10: 10 | 10 | 10
Route11: 11 | 11 | 11
Route12: 12 | 12 | 12
Route13: 13 | 13 | 13
Route14: 14 | 14 | 14
Route15: 15 | 15 | 15
Bottom: 16 | 16 | 16
tPlace: CURVED / TRACE | 0201 | 0402 | 0603 | 0805 | 1206 | 2010 | 2512
bPlace: 0402 | 0603 | 0805 | 1206 | 1808
bValues: BOTTOM